# EAGLE board easy-power (EAGLE 5.07)

Size 163.81 x 101.27 mm. Coordinates in mm from the lower left corner, seen from the top.
Outline: 0,0 163.81,1.27 163.81,101.27 0,100 0,0
Copper layers (1*16): Top 0.035mm / dielectric 1.5mm / Bottom 0.035mm
Design rules "default": minimum track width 10mil, minimum drill 24mil, track to track 8mil, track to pad 8mil, pad to pad 8mil, via to via 8mil, smd to smd 8mil, copper to edge 40mil, drill to drill 8mil, minimum pad ring 10mil, minimum via ring 8mil, stop-mask expansion 4mil, vias tented up to drill 0mil, thermal gap 10mil

## Footprints (pad centres in the part's own frame; a part is rotated, then mirrored left to right if it is on the bottom)
5-2,5 = smd 2.54 x 5.08: 1 0,0
POWER_JACK_2.1X5.5_BIG_PTH = drill 2.667 pad 4.191 round: GND 0,-0.127 | drill 2.337 pad 4.064 round: GNDBREAK 4.547,2.87 | drill 2.667 pad 4.064 square: PWR 0,6.35
1X02 = drill 1.016 pad 1.88 round: 1 0,0; 2 2.54,0
XH-1X2-LONG-LOCK = drill 1.016 pad 1.88 long: 1 1.397,0; 2 -1.397,0
SWITCH-SPDT-AM#6 = drill 0.762 pad 1.27 long: 1 0,2; 2 0,0; 3 0,-2 | drill 1.15 pad 2.184 square: P$1 0,-4.445; P$2 0,4.445

## Placement (x,y rotation side)
C+  [5-2,5]  59.69,67.31 0 top
C-  [5-2,5]  46.99,36.83 270 top
I+  [5-2,5]  52.07,67.31 0 top
I-  [5-2,5]  69.85,67.31 90 top
J1  POWER_JACKPTH_BIG  [POWER_JACK_2.1X5.5_BIG_PTH]  11.43,68.58 270 top
JP1  [1X02]  3.81,52.07 90 top
JP2  [1X02]  3.81,43.18 90 top
JP3  [XH-1X2-LONG-LOCK]  82.55,64.77 270 top
LI2  [5-2,5]  12.7,45.72 270 top
LI-1  [5-2,5]  11.43,52.07 270 top
S1  [SWITCH-SPDT-AM#6]  25.4,52.07 0 top
S2  [SWITCH-SPDT-AM#6]  36.83,67.31 180 top
V+  [5-2,5]  46.99,67.31 0 top
V-  [5-2,5]  57.15,36.83 90 top

## Library data of the parts
C+ C- I+ I- LI2 LI-1 V+ V- = wirepad
J1 JP1-JP3 S1 S2 = digital-toy

## Nets
GND: C-.1 J1.GND JP2.1 JP3.2 S1.1 V-.1
N$1: JP1.1 LI-1.1 S1.2
N$2: JP2.2 LI2.1 S1.3
N$3: JP1.2 S2.1
N$4: C+.1 I+.1 S2.2 V+.1
N$5: J1.PWR S2.3
N$6: I-.1 JP3.1

## Tracks (layer width: path | path; a pad name or v marks a point on that pad's centre or on a via)
GND  (5 unrouted)
N$1  (2 unrouted)
N$2  (2 unrouted)
N$3  (1 unrouted)
N$4  (3 unrouted)
N$5  (1 unrouted)
N$6  (1 unrouted)